# Altium PCB bootleg-3.PcbDoc (part 1 of 2)
Units mm, origin at the board's own origin, x right, y up, seen from the top; angles counter-clockwise.
Board outline 284.8 x 94.3 mm, 2 copper layers (Component Side, Bottom Layer), stack 1.571 mm thick; 153 components, 101 nets, 724 pads, 53 vias.
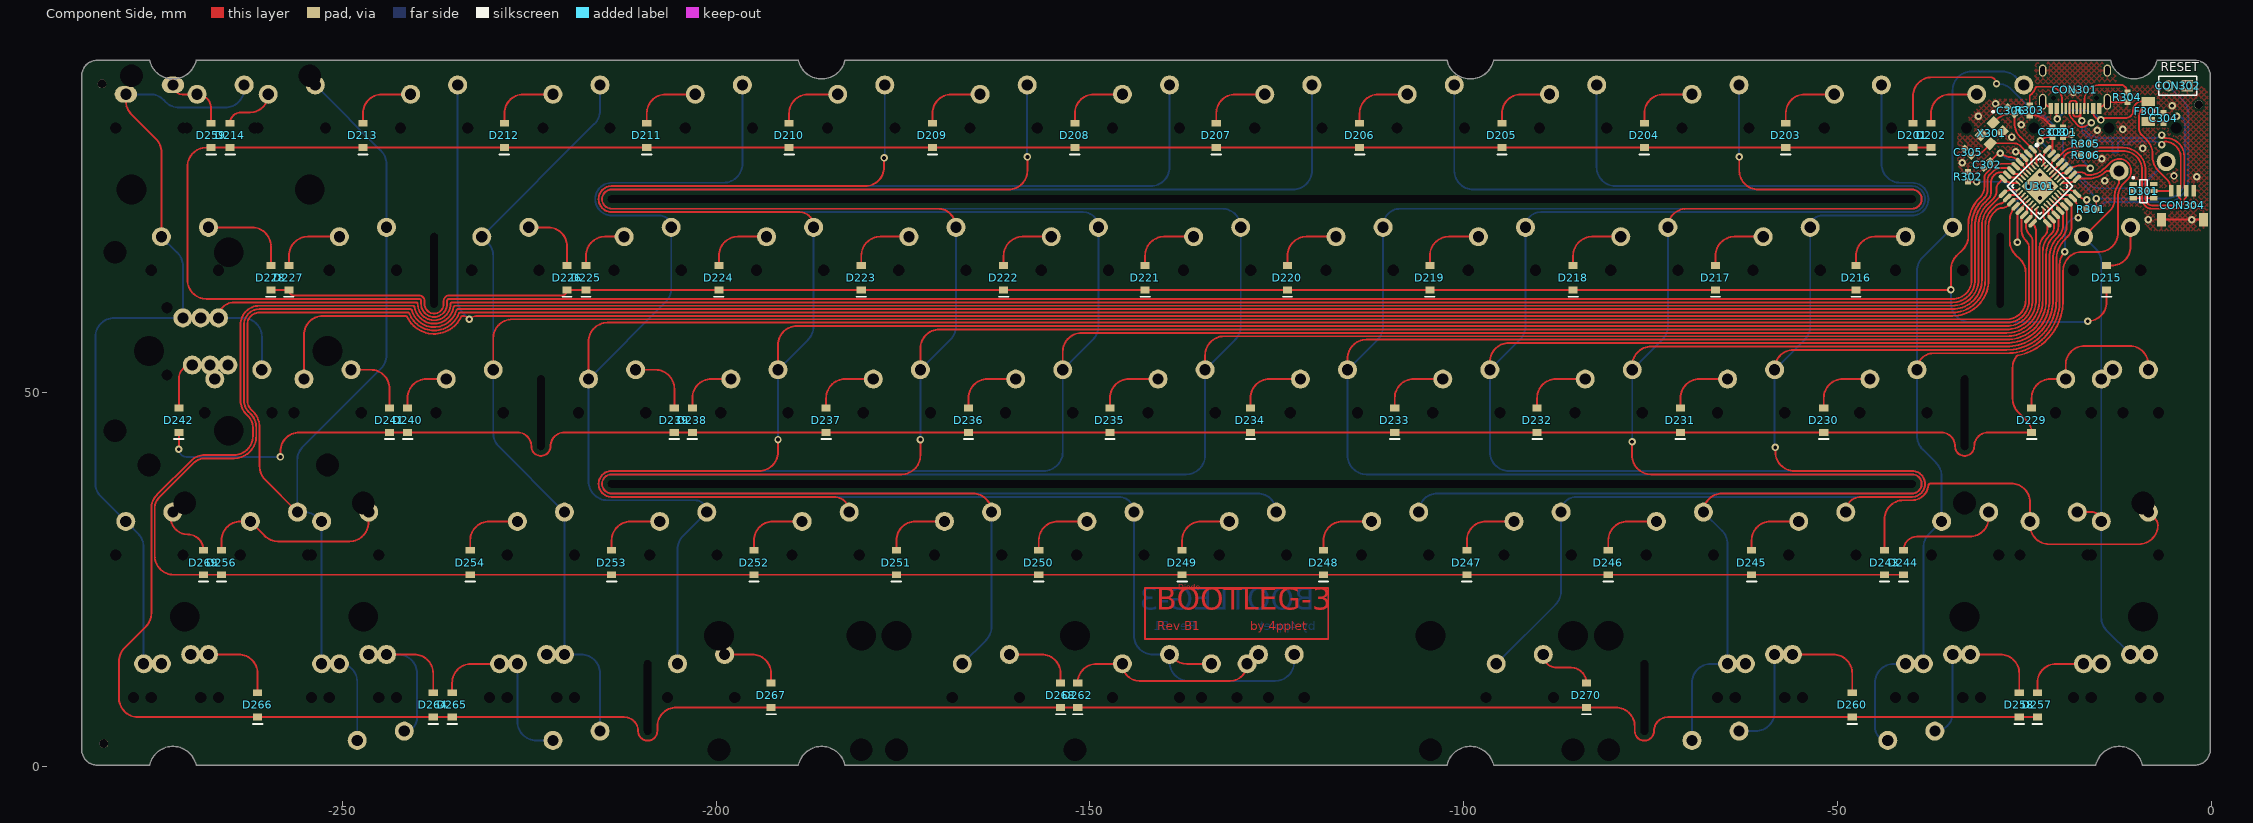
[diagram p0: Component Side view]
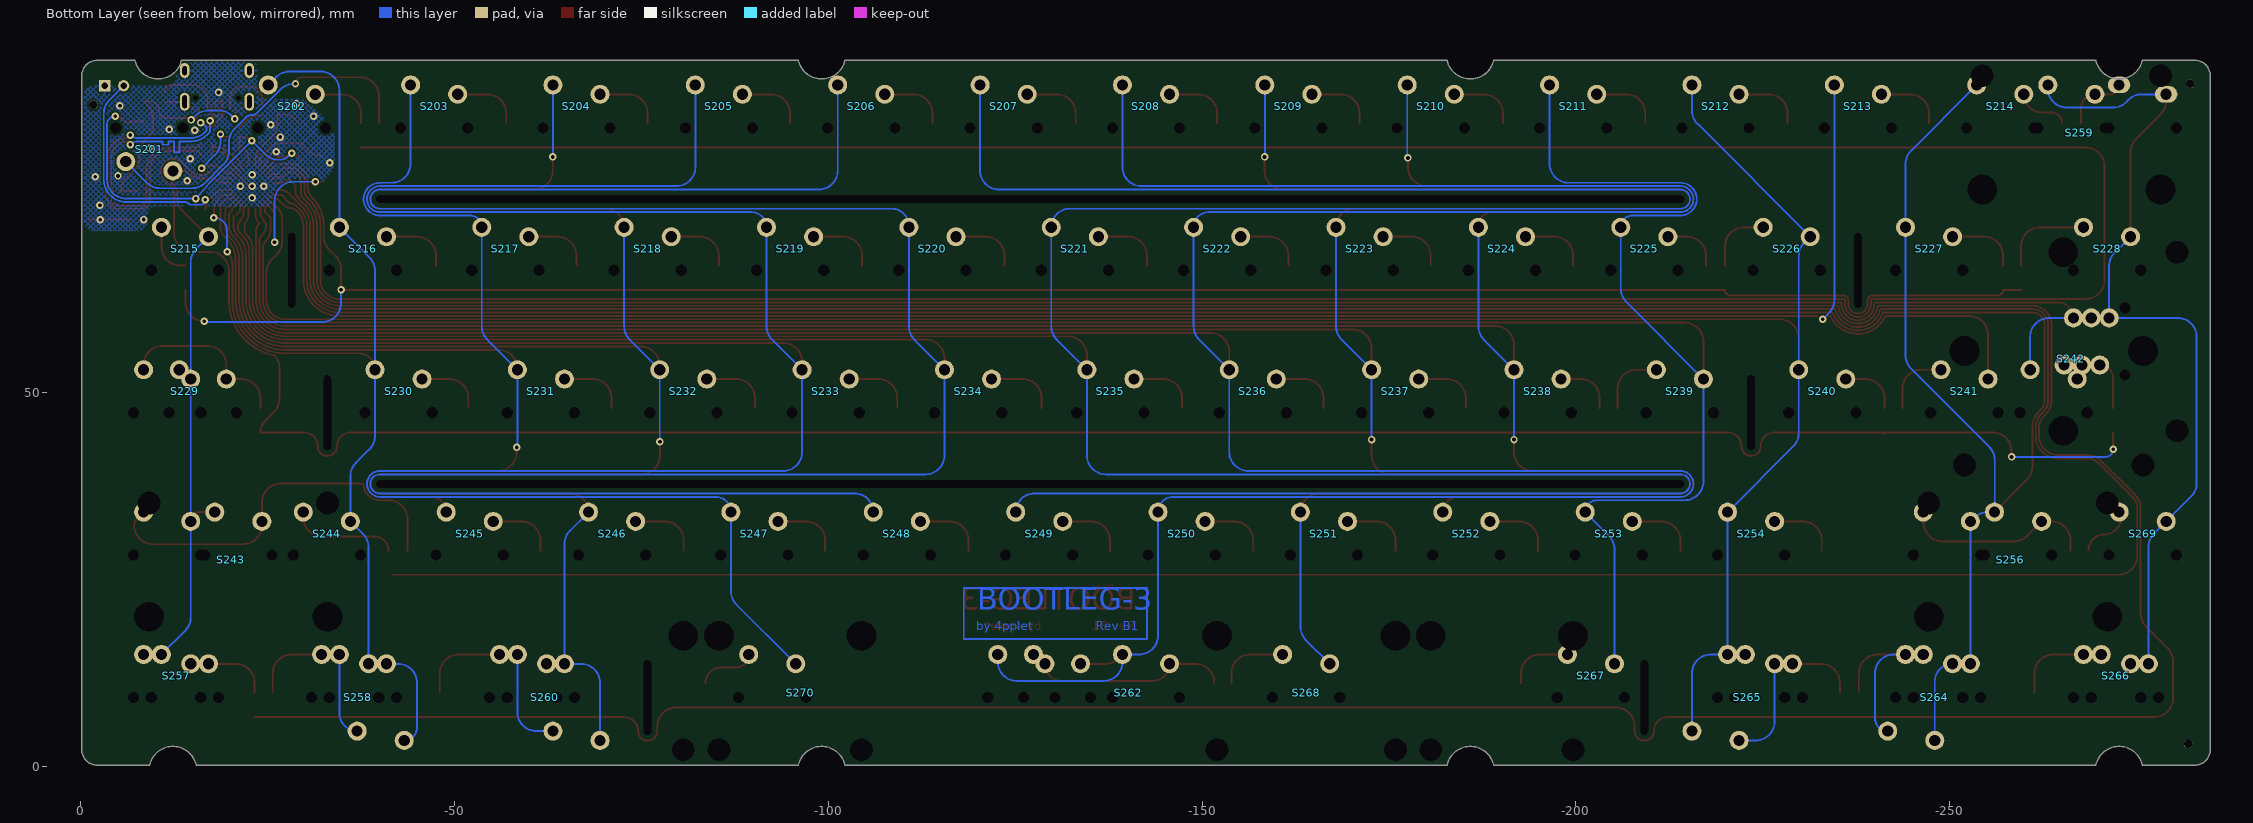
[diagram p1: Bottom Layer view, seen from below]

## Layer stack, top to bottom
Top Solder: solder mask 0.0102, Solder Resist, Dk 3.5
Component Side: signal copper 0.0356
Dielectric 1: core 1.5, FR-4, Dk 4.2
Bottom Layer: signal copper 0.0356
Solder Side: solder mask 0.0102, Solder Resist, Dk 3.5

## Board outline
-282.85,0.165 ccw(c-282.85,0.215) -282.85,0.165 cw(c-282.85,2.215) -284.9,2.215 -284.9,36.565 -284.9,92.414 cw(c-284.85,92.415) -284.9,92.415 cw(c-282.85,92.415) -282.85,94.465 cw(c-282.85,94.415) -282.85,94.465 -275.85,94.465 cw(c-275.85,94.415) -275.801,94.426 ccw(c-272.7,95.149) -269.599,94.426 cw(c-269.55,94.415) -269.55,94.465 -189.05,94.465 cw(c-189.05,94.415) -189.001,94.426 ccw(c-185.9,95.149) -182.799,94.426 cw(c-182.75,94.415) -182.75,94.465 -102.25,94.465 cw(c-102.25,94.415) -102.201,94.426 ccw(c-99.1,95.149) -95.999,94.426 cw(c-95.95,94.415) -95.95,94.465 cw(c-95.95,94.415) -95.95,94.465 -13.477,94.465 cw(c-13.477,94.415) -13.428,94.426 ccw(c-10.327,95.149) -7.226,94.426 cw(c-7.177,94.415) -7.164,94.464 cw(c-7.15,94.415) -7.15,94.465 -2.15,94.465 cw(c-2.15,92.415) -0.1,92.415 -0.1,2.288 -0.1,2.286 ccw(c-0.15,2.286) -0.1,2.288 -0.1,2.286 cw(c-0.15,2.286) -0.1,2.285 -0.1,2.215 cw(c-2.15,2.215) -2.15,0.165 -9.15,0.165 ccw(c-9.15,0.215) -9.15,0.165 cw(c-9.15,0.215) -9.199,0.204 ccw(c-12.3,-0.52) -15.401,0.204 cw(c-15.45,0.215) -15.45,0.165 -95.95,0.165 cw(c-95.95,0.215) -95.999,0.204 ccw(c-99.1,-0.52) -102.201,0.204 ccw(c-99.1,-0.52) -102.201,0.204 cw(c-102.25,0.215) -102.25,0.165 -182.75,0.165 cw(c-182.75,0.215) -182.799,0.204 cw(c-185.9,-0.52) -182.799,0.204 ccw(c-185.9,-0.52) -189.001,0.204 cw(c-189.05,0.215) -189.05,0.165 -269.55,0.165 cw(c-269.55,0.215) -269.55,0.165 cw(c-269.55,0.215) -269.599,0.204 ccw(c-272.7,-0.52) -275.801,0.204 ccw(c-272.7,-0.52) -275.801,0.204 cw(c-275.85,0.215) -275.85,0.165

## Design rules (kind name [scope] priority, off if disabled: settings)
Clearance [All] p1: gap=0.2 ignorepadtopadclearanceinfootprint=FALSE except(0: Arc-Hole Track-Hole SMDPad-Hole THPad-Hole Via-Hole Fill-Hole Poly-Hole Region-Hole Text-Hole; 0.254: THPad-THPad THPad-Via THPad-Fill THPad-Poly THPad-Region THPad-Text Via-Via Via-Fill Via-Poly Via-Region Via-Text Fill-Fill Fill-Poly Fill-Region Fill-Text Poly-Poly Poly-Region Poly-Text Region-Region Region-Text Text-Text)
ComponentClearance [InComponent('No Component') And OnLayer('Component Side')] p1: gap=0.254 collisioncheckmode=3 verticalgap=0.254 showdistances=FALSE
DiffPairsRouting DiffPairsRouting_USB [InDifferentialPairClass('All Differential Pairs')] p1: maxlimit=0.254 minlimit=0.203 mostfreqgap=0.203 toplayer_minwidth=0.152 toplayer_maxwidth=0.381 toplayer_prefwidth=0.152 bottomlayer_minwidth=0.152 bottomlayer_maxwidth=0.381 bottomlayer_prefwidth=0.152 maxuncoupledlength=12.7
DiffPairsRouting [All] p2: maxlimit=0.254 minlimit=0.254 mostfreqgap=0.254 toplayer_minwidth=0.381 toplayer_maxwidth=0.381 toplayer_prefwidth=0.381 bottomlayer_minwidth=0.381 bottomlayer_maxwidth=0.381 bottomlayer_prefwidth=0.381 maxuncoupledlength=12.7
HoleSize [All] p1: absolutevalues=TRUE maxlimit=20 minlimit=0.025 maxpercent=80.000 minpercent=20.000
MatchedLengths MatchedLengths_USB_DiffPairs_1 [All] p1: tolerance=0.127 checknetsindiffpair=TRUE checkdiffpairvsdiffpair=FALSE checkxsignals=FALSE checkothers=FALSE
MatchedLengths MatchedLengths_USB_DiffPairs [All] p2: tolerance=0.127 checknetsindiffpair=TRUE checkdiffpairvsdiffpair=FALSE checkxsignals=FALSE checkothers=FALSE
PolygonConnect PolygonConnect_1 [All vs IsVia] p1: connectstyle=Direct reliefconductorwidth=0.254 reliefentries=4 polygonreliefangle="90 Angle" airgapwidth=0.254
PolygonConnect [All] p2: connectstyle=Relief reliefconductorwidth=0.254 reliefentries=4 polygonreliefangle="90 Angle" airgapwidth=0.254
RoutingVias [All] p1: holewidth=0.711 width=1.27 viastyle="Through Hole" minholewidth=0.711 minwidth=1.27 maxholewidth=0.711 maxwidth=1.27
SolderMaskExpansion [All] p1: expansion=0.102 istentingtop=FALSE
Width [All] p1: maxlimit=0.254 minlimit=0.203 preferedwidth=0.254
27 further rules are at their usual default settings.

## Classes and differential pairs
component class Designator: C201 C202 C203 C204 C205 C206 D201 D202 D203 D204 D205 D206 D207 D208 D209 D210 D211 D212 D213 D214 D215 D216 D217 D218 D219 D220 D221 D222 D223 D224 D225 D226 D227 D228 D229 D230 D231 D232 D233 D234 D235 D236 D237 D238 D239 D240 D241 D242 D243 D244 D245 D246 D247 D248 D249 D250 D251 D252 D253 D254 D256 D257 D258 D259 D260 D262 D264 D265 D266 D267 D268 D269 D270 S201 S202 S203 S204 S205 S206 S207 S208 S209 S210 S211 S212 S213 S214 S215 S216 S217 S218 S219 S220 S221 S222 S223 S224 S225 S226 S227 S228 S229 S230 S231 S232 S233 S234 S235 S236 S237 S238 S239 S240 S241 S242 S243 S244 S245 S246 S247 S248 S249 S250 S251 S252 S253 S254 S256 S257 S258 S259 S260 S262 S264 S265 S266 S267 S268 S269 S270
differential pair D_PRE: +D_PRE_P -D_PRE_N
differential pair D: +D_P -D_N

## Components (designator, comment, footprint, x,y, rotation, side; value= is the part's Value field where it differs from the comment)
C301 "" C0603[1608] -19.812,84.836 r270 top value=1uF
C302 "" C0603[1608] -29.972,80.518 r45 top value=0.1uF
C303 "" C0603[1608] -21.209,84.836 r270 top value=0.1uF
C304 "" C0603[1608] -6.35,86.741 r270 top value=4,7uF
C305 "" C0603[1608] -32.512,82.169 r315 top value=15pF
C306 "" C0603[1608] -26.749,87.709 r315 top value=15pF
CON301 "TYPE-C-31-M-12" TYPE-C-31-M-12 -18.2,88 r180 top locked
CON302 "Header 2" HDR1X2 -3.175,91.059 r180 top
CON304 "Header 5" "JST SM04B-SRSS-TB" -6.616,73.152 r0 top
D201 "Diode" SOD-123 -39.878,84.415 r90 top locked
D202 "Diode" SOD-123 -37.465,84.415 r90 top locked
D203 "Diode" SOD-123 -56.896,84.415 r90 top locked
D204 "Diode" SOD-123 -75.819,84.415 r90 top locked
D205 "Diode" SOD-123 -94.869,84.415 r90 top locked
D206 "Diode" SOD-123 -113.919,84.415 r90 top locked
D207 "Diode" SOD-123 -133.096,84.415 r90 top locked
D208 "Diode" SOD-123 -152.019,84.415 r90 top locked
D209 "Diode" SOD-123 -171.069,84.415 r90 top locked
D210 "Diode" SOD-123 -190.246,84.415 r90 top locked
D211 "Diode" SOD-123 -209.296,84.415 r90 top locked
D212 "Diode" SOD-123 -228.346,84.415 r90 top locked
D213 "Diode" SOD-123 -247.269,84.415 r90 top locked
D214 "Diode" SOD-123 -265.049,84.415 r90 top locked
D215 "Diode" SOD-123 -13.97,65.365 r90 top locked
D216 "Diode" SOD-123 -47.498,65.365 r90 top locked
D217 "Diode" SOD-123 -66.294,65.365 r90 top locked
D218 "Diode" SOD-123 -85.344,65.365 r90 top locked
D219 "Diode" SOD-123 -104.521,65.365 r90 top locked
D220 "Diode" SOD-123 -123.571,65.365 r90 top locked
D221 "Diode" SOD-123 -142.621,65.365 r90 top locked
D222 "Diode" SOD-123 -161.544,65.365 r90 top locked
D223 "Diode" SOD-123 -180.594,65.365 r90 top locked
D224 "Diode" SOD-123 -199.644,65.365 r90 top locked
D225 "Diode" SOD-123 -217.424,65.365 r90 top locked
D226 "Diode" SOD-123 -219.964,65.365 r90 top locked
D227 "Diode" SOD-123 -257.175,65.365 r90 top locked
D228 "Diode" SOD-123 -259.588,65.365 r90 top locked
D229 "Diode" SOD-123 -24.003,46.315 r90 top locked
D230 "Diode" SOD-123 -51.816,46.315 r90 top locked
D231 "Diode" SOD-123 -70.993,46.315 r90 top locked
D232 "Diode" SOD-123 -90.17,46.315 r90 top locked
D233 "Diode" SOD-123 -109.22,46.315 r90 top locked
D234 "Diode" SOD-123 -128.524,46.315 r90 top locked
D235 "Diode" SOD-123 -147.32,46.315 r90 top locked
D236 "Diode" SOD-123 -166.243,46.315 r90 top locked
D237 "Diode" SOD-123 -185.293,46.315 r90 top locked
D238 "Diode" SOD-123 -203.2,46.315 r90 top locked
D239 "Diode" SOD-123 -205.613,46.315 r90 top locked
D240 "Diode" SOD-123 -241.3,46.315 r90 top locked
D241 "Diode" SOD-123 -243.713,46.315 r90 top
D242 "Diode" SOD-123 -271.907,46.315 r90 top
D243 "Diode" SOD-123 -43.688,27.265 r90 top locked
D244 "Diode" SOD-123 -41.148,27.265 r90 top locked
D245 "Diode" SOD-123 -61.468,27.265 r90 top locked
D246 "Diode" SOD-123 -80.645,27.265 r90 top locked
D247 "Diode" SOD-123 -99.568,27.265 r90 top locked
D248 "Diode" SOD-123 -118.745,27.265 r90 top locked
D249 "Diode" SOD-123 -137.668,27.265 r90 top locked
D250 "Diode" SOD-123 -156.845,27.265 r90 top locked
D251 "Diode" SOD-123 -175.895,27.265 r90 top locked
D252 "Diode" SOD-123 -194.945,27.265 r90 top locked
D253 "Diode" SOD-123 -213.995,27.265 r90 top locked
D254 "Diode" SOD-123 -232.918,27.265 r90 top locked
D256 "Diode" SOD-123 -266.192,27.265 r90 top locked
D257 "Diode" SOD-123 -23.241,8.215 r90 top locked
D258 "Diode" SOD-123 -25.654,8.215 r90 top locked
D259 "Diode" SOD-123 -267.589,84.415 r90 top locked
D260 "Diode" SOD-123 -48.006,8.215 r90 top locked
D262 "Diode" SOD-123 -151.638,9.5 r90 top locked
D264 "Diode" SOD-123 -237.871,8.215 r90 top locked
D265 "Diode" SOD-123 -235.331,8.215 r90 top locked
D266 "Diode" SOD-123 -261.366,8.215 r90 top locked
D267 "Diode" SOD-123 -192.659,9.51 r90 top locked
D268 "Diode" SOD-123 -153.924,9.5 r90 top locked
D269 "Diode" SOD-123 -268.605,27.265 r90 top locked
D270 "Diode" SOD-123 -83.566,9.5 r90 top locked
D301 "SRV05" SOT-23-6 -9.017,76.962 r0 top
F301 "Fuse Thermal" C1206[3216] -8.382,87.63 r90 top
R301 "Res1" R0603[1608] -16.002,74.549 r180 top value=10K
R302 "Res1" R0603[1608] -32.512,78.867 r90 top value=10K
R303 "Res1" R0603[1608] -24.257,87.757 r270 top value=5k1
R304 "Res1" R0603[1608] -11.176,89.535 r270 top value=5k1
R305 "Res1" R0603[1608] -16.764,83.312 r0 top value=22
R306 "Res1" R0603[1608] -16.764,81.788 r0 top value=22
S201 "MX" "SMK-switch - switched polarity" -9.15,85.415 r0 bottom
S202 "MX" "SMK-switch - switched polarity" -28.2,85.415 r180 bottom locked
S203 "MX" "SMK-switch - switched polarity" -47.25,85.415 r180 bottom locked
S204 "MX" "SMK-switch - switched polarity" -66.3,85.415 r180 bottom locked
S205 "MX" "SMK-switch - switched polarity" -85.35,85.415 r180 bottom locked
S206 "MX" "SMK-switch - switched polarity" -104.4,85.415 r180 bottom locked
S207 "MX" "SMK-switch - switched polarity" -123.45,85.415 r180 bottom locked
S208 "MX" "SMK-switch - switched polarity" -142.5,85.415 r180 bottom locked
S209 "MX" "SMK-switch - switched polarity" -161.55,85.415 r180 bottom locked
S210 "MX" "SMK-switch - switched polarity" -180.6,85.415 r180 bottom locked
S211 "MX" "SMK-switch - switched polarity" -199.65,85.415 r180 bottom locked
S212 "MX" "SMK-switch - switched polarity" -218.7,85.415 r180 bottom locked
S213 "MX" "SMK-switch - switched polarity" -237.75,85.415 r180 bottom locked
S214 "MX" "SMK-switch - switched polarity" -256.8,85.415 r180 bottom locked
S215 "MX" "SMK-switch - 1.5U" -13.912,66.365 r180 bottom locked
S216 "MX" "SMK-switch - switched polarity" -37.725,66.365 r180 bottom
S217 "MX" "SMK-switch - switched polarity" -56.775,66.365 r180 bottom locked
S218 "MX" "SMK-switch - switched polarity" -75.825,66.365 r180 bottom locked
S219 "MX" "SMK-switch - switched polarity" -94.875,66.365 r180 bottom locked
S220 "MX" "SMK-switch - switched polarity" -113.925,66.365 r180 bottom locked
S221 "MX" "SMK-switch - switched polarity" -132.975,66.365 r180 bottom locked
S222 "MX" "SMK-switch - switched polarity" -152.025,66.365 r180 bottom locked
S223 "MX" "SMK-switch - switched polarity" -171.075,66.365 r180 bottom locked
S224 "MX" "SMK-switch - switched polarity" -190.125,66.365 r180 bottom locked
S225 "MX" "SMK-switch - switched polarity" -209.175,66.365 r180 bottom locked
S226 "MX" SMK-switch -228.225,66.365 r180 bottom locked
S227 "MX" "SMK-switch - switched polarity" -247.275,66.365 r180 bottom locked
S228 "MX" "SMK-switch - 1.5U" -271.087,66.365 r180 bottom locked
S229 "MX" "SMK-switch - CAPS - dual" -16.294,47.315 r180 bottom
S230 "MX" "SMK-switch - switched polarity" -42.487,47.315 r180 bottom locked
S231 "MX" "SMK-switch - switched polarity" -61.537,47.315 r180 bottom locked
S232 "MX" "SMK-switch - switched polarity" -80.587,47.315 r180 bottom locked
S233 "MX" "SMK-switch - switched polarity" -99.637,47.315 r180 bottom locked
S234 "MX" "SMK-switch - switched polarity" -118.687,47.315 r180 bottom locked
S235 "MX" "SMK-switch - switched polarity" -137.737,47.315 r180 bottom locked
S236 "MX" "SMK-switch - switched polarity" -156.787,47.315 r180 bottom locked
S237 "MX" "SMK-switch - switched polarity" -175.837,47.315 r180 bottom locked
S238 "MX" "SMK-switch - switched polarity" -194.887,47.315 r180 bottom locked
S239 "MX" SMK-switch -213.937,47.315 r180 bottom locked
S240 "MX" "SMK-switch - switched polarity" -232.987,47.315 r180 bottom locked
S241 "MX" SMK-switch -252.012,47.315 r180 bottom locked
S242 "MX" "SMK-switch - Enter" -263.95,47.315 r180 bottom locked
S243 "MX" "SMK-switch - Left shift v2" -21.056,28.265 r180 bottom locked
S244 "MX" SMK-switch -32.893,28.265 r180 bottom locked
S245 "MX" "SMK-switch - switched polarity" -52.012,28.265 r180 bottom locked
S246 "MX" "SMK-switch - switched polarity" -71.062,28.265 r180 bottom locked
S247 "MX" "SMK-switch - switched polarity" -90.112,28.265 r180 bottom locked
S248 "MX" "SMK-switch - switched polarity" -109.162,28.265 r180 bottom locked
S249 "MX" "SMK-switch - switched polarity" -128.212,28.265 r180 bottom locked
S250 "MX" "SMK-switch - switched polarity" -147.262,28.265 r180 bottom locked
S251 "MX" "SMK-switch - switched polarity" -166.312,28.265 r180 bottom locked
S252 "MX" "SMK-switch - switched polarity" -185.362,28.265 r180 bottom locked
S253 "MX" "SMK-switch - switched polarity" -204.412,28.265 r180 bottom locked
S254 "MX" "SMK-switch - switched polarity" -223.462,28.265 r180 bottom locked
S256 "MX" "SMK-switch - right shift v2" -259.18,28.265 r180 bottom
S257 "MX" "SMK-switch - 1.5u MOD-L" -13.912,9.215 r180 bottom locked
S258 "MX" "SMK-switch - L_WIN V2" -37.719,9.215 r180 bottom
S259 "MX" "SMK-switch - backspace" -266.319,85.415 r180 bottom
S260 "MX" "SMK-switch - L_ALT V2" -61.537,9.215 r180 bottom locked
S262 "MX" "SMK-SWITCH - SPACE_V3" -142.499,9.215 r180 bottom locked
S264 "MX" "SMK-switch - R_WIN V2" -247.269,9.215 r180 bottom
S265 "MX" "SMK-switch - R_ALT V2" -223.462,9.215 r180 bottom
S266 "MX" "SMK-switch - 1.5u MOD-R" -271.087,9.215 r180 bottom locked
S267 "MX" SMK-switch -202.031,9.215 r180 bottom
S268 "MX" "SMK-switch - R split space_V2" -163.931,9.215 r0 bottom locked
S269 "MX" SMK-switch -275.85,28.265 r180 bottom locked
S270 "MX" "SMK-switch - L split space_V2" -102.018,9.215 r0 bottom locked
U301 "ATMEGA32U2" ATMEGA32U2-COMBO -22.886,77.6 r315 top
X301 "XTAL" XTAL-3225 -29.337,84.709 r225 top

## Footprints (in the part's own frame and the unit in brackets; to place one, negate y for a bottom-side part, rotate by r counter-clockwise, add the part's x,y. Pads: shape width x height; smd on the part's side, far side on the other; paste and mask are expansions set on the pad)
ATMEGA32U2-COMBO [mm]
  oval 1.4x0.55 smd: 1(-4.2,2.8) 2(-4.2,2) 3(-4.2,1.2) 4(-4.2,0.4) 5(-4.2,-0.4) 6(-4.2,-1.2) 7(-4.2,-2) 8(-4.2,-2.8) 17(4.2,-2.8) 18(4.2,-2) 19(4.2,-1.2) 20(4.2,-0.4) 21(4.2,0.4) 22(4.2,1.2) 23(4.2,2) 24(4.2,2.8)
  oval 0.85x0.25 smd: 1(-2.4,1.75) 2(-2.4,1.25) 3(-2.4,0.75) 4(-2.4,0.25) 5(-2.4,-0.25) 6(-2.4,-0.75) 7(-2.4,-1.25) 8(-2.4,-1.75) 17(2.4,-1.75) 18(2.4,-1.25) 19(2.4,-0.75) 20(2.4,-0.25) 21(2.4,0.25) 22(2.4,0.75) 23(2.4,1.25) 24(2.4,1.75)
  oval 0.55x1.4 smd: 9(-2.8,-4.2) 10(-2,-4.2) 11(-1.2,-4.2) 12(-0.4,-4.2) 13(0.4,-4.2) 14(1.2,-4.2) 15(2,-4.2) 16(2.8,-4.2) 25(2.8,4.2) 26(2,4.2) 27(1.2,4.2) 28(0.4,4.2) 29(-0.4,4.2) 30(-1.2,4.2) 31(-2,4.2) 32(-2.8,4.2)
  oval 0.25x0.85 smd: 9(-1.75,-2.4) 10(-1.25,-2.4) 11(-0.75,-2.4) 12(-0.25,-2.4) 13(0.25,-2.4) 14(0.75,-2.4) 15(1.25,-2.4) 16(1.75,-2.4) 25(1.75,2.4) 26(1.25,2.4) 27(0.75,2.4) 28(0.25,2.4) 29(-0.25,2.4) 30(-0.75,2.4) 31(-1.25,2.4) 32(-1.75,2.4)
  rect 3.5x3.5 smd: 28(0,0)
  silkscreen extent -4.32,-3.1 3.1,3.75, body extent -2.51,-2.51 2.51,2.51, height 1
C0603[1608] [mm] "Chip Resistor, 2-Leads, Body 1,57x0,80mm, IPC Medium Density"
  rect 0.8x0.85 smd: 1(-0.65,0) 2(0.65,0)
  body extent -0.83,-0.43 0.82,0.43, height 0.5
C1206[3216] [mm]
  rect 1.2x1.8 smd: 1(-1.35,0) 2(1.35,0)
  silkscreen extent -0.35,-0.8 0.35,0.8, body extent -1.6,-0.9 1.6,0.9, height 1.2
HDR1X2 [mm] "Connector; Header; 2 Position"
  rect 1.5x1.5 hole 0.9 mask+0.102: 1(0,0)
  round 1.5 hole 0.9 mask+0.102: 2(2.54,0)
  silkscreen extent -1.27,-1.27 3.81,1.27
"JST SM04B-SRSS-TB" [mm]
  rect 0.6x1.55 smd: 1(1.3,3.875) 2(2.3,3.875) 3(3.3,3.875) 4(4.3,3.875)
  rect 1.2x1.8 smd: 5(0,0) 5(5.6,0)
  body extent -0.21,-0.76 5.79,4.19, height 3.25
R0603[1608] [mm] "Chip Resistor, 2-Leads, Body 1,57x0,80mm, IPC Medium Density"
  rect 0.8x0.85 smd: 1(-0.65,0) 2(0.65,0)
  body extent -0.83,-0.43 0.82,0.43, height 0.5
SMK-switch [mm]
  round 2.54 hole 1.499 mask+0.102: 1(-3.15,5.75) 2(3.15,4.5)
  round 1 hole 1.5 unplated: ""(-4.5,0) ""(4.5,0)
  round 1 on Mech14: ""(0,0)
"SMK-switch - 1.5U" [mm]
  round 2.54 hole 1.499 mask+0.102: 1(-3.15,5.75) 2(3.15,4.5)
  round 1 hole 1.5 unplated: ""(-4.5,0) ""(4.5,0)
  round 1 on Mech14: ""(0,0)
"SMK-switch - 1.5u MOD-L" [mm]
  round 2.54 hole 1.499 mask+0.102: 1(-5.531,5.75) 1(-3.15,5.75) 2(0.769,4.5) 2(3.15,4.5)
  round 1 hole 1.5 unplated: ""(-6.881,0) ""(-4.5,0) ""(2.119,0) ""(4.5,0)
  round 1 on Mech14: ""(-2.381,0) ""(0,0)
"SMK-switch - 1.5u MOD-R" [mm]
  round 2.54 hole 1.499 mask+0.102: 1(-3.15,5.75) 1(-0.769,5.75) 2(3.15,4.5) 2(5.531,4.5)
  round 1 hole 1.5 unplated: ""(-4.5,0) ""(-2.119,0) ""(4.5,0) ""(6.881,0)
  round 1 on Mech14: ""(0,0) ""(2.381,0)
"SMK-switch - backspace" [mm]
  round 2.54 hole 1.499 mask+0.102: 1(3.15,4.5) 2(-3.15,5.75)
  oval 3x2.2 hole 1.499 mask+0.102: 1(6.375,5.75) 2(12.675,4.5)
  round 1.524 hole 3.988 unplated: ""(-11.938,-8.255) ""(11.938,-8.255)
  round 1.524 hole 3.048 unplated: ""(-11.938,6.985) ""(11.938,6.985)
  round 1 hole 1.5 unplated: ""(-4.5,0) ""(4.5,0) ""(5.025,0) ""(14.025,0)
  round 1 on Mech14: ""(0,0) ""(9.525,0)
"SMK-switch - CAPS - dual" [mm]
  round 2.54 hole 1.499 mask+0.102: 1(-7.912,5.75) 1(3.15,4.5) 2(-3.15,5.75) 2(-1.613,4.5)
  round 1 hole 1.5 unplated: ""(-9.263,0) ""(-4.5,0) ""(-0.262,0) ""(4.5,0)
  round 1 on Mech14: ""(-4.763,0) ""(0,0)
"SMK-switch - Enter" [mm]
  round 2.54 hole 1.499 mask+0.102: 1(-3.15,5.75) 1(2.649,12.68) 1(5.03,12.68) 1(7.411,12.68) 2(1.399,6.38) 2(3.15,4.5) 2(3.78,6.38) 2(6.161,6.38)
  round 1.524 hole 3.048 unplated: ""(-11.938,-6.985) ""(11.938,-6.985) ""(16.515,-2.408) ""(16.515,21.468)
  round 1.524 hole 3.988 unplated: ""(-11.938,8.255) ""(1.275,-2.408) ""(1.275,21.468) ""(11.938,8.255)
  round 1 hole 1.5 unplated: ""(-4.5,0) ""(4.5,0) ""(9.53,5.03) ""(9.53,14.03)
  round 1 on Mech14: ""(0,0) ""(7.149,9.53) ""(9.53,9.53) ""(11.911,9.53)
"SMK-switch - L split space_V2" [mm]
  round 2.54 hole 1.499 mask+0.102: 1(12.675,-5.75) 2(6.375,-4.5)
  round 1.524 hole 3.988 unplated: ""(-2.413,-8.255)
  round 1.524 hole 3.048 unplated: ""(-2.413,6.985)
  round 1 hole 1.5 unplated: ""(5.025,0) ""(14.025,0)
  round 1 on Mech14: ""(9.525,0)
"SMK-switch - L_ALT V2" [mm]
  round 2.54 hole 1.499 mask+0.102: 1(-5.531,5.75) 1(-3.15,5.75) 1(1.613,-4.5) 2(0.769,4.5) 2(3.15,4.5) 2(7.912,-5.75)
  round 1 hole 1.5 unplated: ""(-6.881,0) ""(-4.5,0) ""(2.119,0) ""(4.5,0)
  round 1 on Mech14: ""(-2.381,0) ""(0,0) ""(4.763,0)
"SMK-switch - L_WIN V2" [mm]
  round 2.54 hole 1.499 mask+0.102: 1(-5.531,5.75) 1(-3.15,5.75) 1(-0.769,-4.5) 2(0.769,4.5) 2(3.15,4.5) 2(5.531,-5.75)
  round 1 hole 1.5 unplated: ""(-6.881,0) ""(-4.5,0) ""(2.119,0) ""(4.5,0)
  round 1 on Mech14: ""(-2.381,0) ""(0,0) ""(2.381,0)
"SMK-switch - Left shift v2" [mm]
  round 2.54 hole 1.499 mask+0.102: 1(-12.675,5.75) 1(3.15,4.5) 2(-6.375,4.5) 2(-3.15,5.75)
  round 1 hole 1.5 unplated: ""(-14.025,0) ""(-5.025,0) ""(-4.5,0) ""(4.5,0)
  round 1.524 hole 3.988 unplated: ""(-11.938,-8.255) ""(11.938,-8.255)
  round 1.524 hole 3.048 unplated: ""(-11.938,6.985) ""(11.938,6.985)
  round 1 on Mech14: ""(-9.525,0) ""(0,0)
"SMK-switch - R split space_V2" [mil]
  round 100 hole 59 mask+4: 1(124.02,-226.38) 2(-124.02,-177.17)
  round 60 hole 157.01 unplated: ""(-470,-325) ""(470,-325)
  round 60 hole 120 unplated: ""(-470,275) ""(470,275)
  round 39.37 hole 59.06 unplated: ""(-177.17,0) ""(177.17,0)
  round 39.37 on Mech14: ""(0,0)
"SMK-switch - R_ALT V2" [mm]
  round 2.54 hole 1.499 mask+0.102: 1(-7.912,-4.5) 1(-3.15,5.75) 1(-0.769,5.75) 2(-1.613,-5.75) 2(3.15,4.5) 2(5.531,4.5)
  round 1 on Mech14: ""(-4.763,0) ""(0,0) ""(2.381,0)
  round 1 hole 1.5 unplated: ""(-4.5,0) ""(-2.119,0) ""(4.5,0) ""(6.881,0)
"SMK-switch - R_WIN V2" [mm]
  round 2.54 hole 1.499 mask+0.102: 1(-5.531,-4.5) 1(-3.15,5.75) 1(-0.769,5.75) 2(0.769,-5.75) 2(3.15,4.5) 2(5.531,4.5)
  round 1 hole 1.5 unplated: ""(-4.5,0) ""(-2.119,0) ""(4.5,0) ""(6.881,0)
  round 1 on Mech14: ""(-2.381,0) ""(0,0) ""(2.381,0)
"SMK-switch - right shift v2" [mm]
  round 2.54 hole 1.499 mask+0.102: 1(-12.675,5.75) 1(3.15,4.5) 2(-6.375,4.5) 2(-3.15,5.75)
  round 1 hole 1.5 unplated: ""(-14.025,0) ""(-5.025,0) ""(-4.5,0) ""(4.5,0)
  round 1.524 hole 3.988 unplated: ""(-11.938,-8.255) ""(11.938,-8.255)
  round 1.524 hole 3.048 unplated: ""(-11.938,6.985) ""(11.938,6.985)
  round 1 on Mech14: ""(-9.525,0) ""(0,0)
"SMK-SWITCH - SPACE_V3" [mm]
  round 2.54 hole 1.499 mask+0.102: 1(-19.826,5.75) 1(-8.756,4.5) 1(-3.15,5.75) 2(-15.056,5.75) 2(-13.526,4.5) 2(3.15,4.5)
  round 1.524 hole 3.048 unplated: ""(-61.91,-6.985) ""(-57.15,-6.985) ""(38.09,-6.985) ""(57.15,-6.985)
  round 1.524 hole 3.988 unplated: ""(-61.91,8.255) ""(-57.15,8.255) ""(38.09,8.255) ""(57.15,8.255)
  round 1 hole 1.5 unplated: ""(-21.176,0) ""(-16.406,0) ""(-12.176,0) ""(-7.406,0) ""(-4.5,0) ""(4.5,0)
  round 1 on Mech14: ""(-16.676,0) ""(-11.906,0) ""(0,0)
"SMK-switch - switched polarity" [mm]
  round 2.54 hole 1.499 mask+0.102: 1(3.15,4.5) 2(-3.15,5.75)
  round 1 hole 1.5 unplated: ""(-4.5,0) ""(4.5,0)
  round 1 on Mech14: ""(0,0)
SOD-123 [mm]
  rect 0.91x1.22 smd: 1(1.635,0) 2(-1.635,0)
  silkscreen extent -2.54,-0.64 -2.54,0.63, body extent -1.87,-0.85 1.88,0.85, height 1.2
SOT-23-6 [mm]
  rect 1x0.55 smd: 1(-1.375,0.95) 2(-1.375,0) 3(-1.375,-0.95) 4(1.375,-0.95) 5(1.375,0) 6(1.375,0.95)
  silkscreen extent -1.5,-1.55 0.46,1.92, body extent -1.37,-1.44 1.47,1.49, height 1.05
TYPE-C-31-M-12 [mm]
  rect 0.6x1.45 smd: A1B12(-3.25,0) A4B9(-2.45,0) B1A12(3.25,0) B4A9(2.45,0)
  rect 0.3x1.45 smd: A5(-1.25,0) A6(-0.25,0) A7(0.25,0) A8(1.25,0) B5(1.75,0) B6(0.75,0) B7(-0.75,0) B8(-1.75,0)
  oval 1x2.1 / inner oval 1x2.1 / far side oval 1.3x2.4 hole 0.6 slot 1.7 at 90 deg: S1(-4.32,-0.915) S1(4.32,-0.915)
  oval 1x1.6 / inner oval 1x1.6 / far side oval 1.3x2 hole 0.6 slot 1.2 at 90 deg: S1(-4.32,-5.095) S1(4.32,-5.095)
  round 0 hole 0.65 unplated: ""(-2.89,-1.445) ""(2.89,-1.445)
  body extent -4.47,-7.72 4.47,0.18, height 3.21
XTAL-3225 [mm]
  rect 1.4x1.2 smd: 1(-1.1,-0.85) 2(1.1,-0.85) 3(1.1,0.85) 4(-1.1,0.85)
  silkscreen extent -2.28,-2.03 -2.03,-1.78, body extent -1.6,-1.25 1.6,1.25, height 0.65

## Part data
C301: library part Cap, "Capacitor", LCSC MFG="Samsung Electro-Mechanics", LCSC Part #=C15849, MFG=KEMET, MFGPN=C0603C104M5RACTU, MRF.Part=CL10A105KB8NNNC, Version="0603 imperial"
C302 C303: library part Cap, "Capacitor", LCSC MFG=YAGEO, LCSC Part #=C14663, MFG=KEMET, MFGPN=C0603C104M5RACTU, MRF.Part=CC0603KRX7R9BB104, Version="0603 imperial"
C304: library part Cap, "Capacitor", LCSC MFG="Samsung Electro-Mechanics", LCSC Part #=C19666, MRF.Part=CL10A475KO8NNNC
C305 C306: library part Cap, "Capacitor", LCSC MFG="Samsung Electro-Mechanics", LCSC Part #=C1644, MRF.Part=CL10C150JB8NNNC, Version="0603 imperial"
CON301: LCSC MFG="Korean Hroparts Elec", LCSC Part #=C165948, MFG="Korean Hroparts Elec", MFGPN=TYPE-C-31-M-12, MRF.Part=TYPE-C-31-M-12
CON302: "Header, 2-Pin"
CON304: "JST for USB daughter board", LCSC MFG="JST Sales America", LCSC Part #=C160404, MFG="JST Sales America Inc.", MFGPN=SM04B-SRSS-TB(LF)(SN), MRF.Part=SM04B-SRSS-TB(LF)(SN)
D201 D202 D203 D204 D205 D206 D207 D208 D209 D210 D211 D212 D213 D214 D215 D216 D217 D218 D219 D220 D221 D222 D223 D224 D225 D226 D227 D228 D229 D230 D231 D232 D233 D234 D235 D236 D237 D238 D239 D240 D241 D242 D243 D244 D245 D246 D247 D248 D249 D250 D251 D252 D253 D254 D256 D257 D258 D259 D260 D262 D264 D265 D266 D267 D268 D269 D270: "Default Diode", LCSC MFG="Brightking Elec (TAIWAN)", LCSC Part #=C109002, MFG="Bourns Inc.", MFGPN=CD0603-B0340R, MRF.Part=CD4148WTP, Version="0603 imperial"
D301: LCSC MFG="ProTek Devices", LCSC Part #=C85364, MRF.Part=SRV05-4-P-T7
F301: "Thermal Fuse", LCSC MFG="Shenzhen JDT Fuse", LCSC Part #=C135338, MFG="Bel Fuse Inc.", MFGPN=0ZCJ0050FF2G, MRF.Part=ASMD1206-050
R301 R302: "Resistor", LCSC MFG="Uniroyal Elec", LCSC Part #=C25804, MFG="Panasonic Electronic Components", MFGPN=ERJ-3EKF5101V, MRF.Part=0603WAF1002T5E, Version="0603 imperial"
R303 R304: "Resistor", LCSC MFG="Uniroyal Elec", LCSC Part #=C23186, MFG="Panasonic Electronic Components", MFGPN=ERJ-3EKF5101V, MRF.Part=0603WAF5101T5E, Version="0603 imperial"
R305 R306: "Resistor", LCSC MFG="Uniroyal Elec", LCSC Part #=C23345, MFG="Panasonic Electronic Components", MFGPN=ERJ-3EKF5101V, MRF.Part=0603WAF220JT5E, Version="0603 imperial"
S201 S202 S203 S204 S205 S206 S207 S208 S209 S210 S211 S212 S213 S214 S216 S217 S218 S219 S220 S221 S222 S223 S224 S225 S226 S227 S228 S229 S230 S231 S232 S233 S234 S235 S236 S237 S238 S239 S240 S241 S242 S243 S244 S245 S246 S247 S248 S249 S250 S251 S252 S253 S254 S256 S257 S258 S259 S260 S262 S264 S265 S266 S267 S268 S269 S270: library part SW-PB, "Switch"
S215: library part SW-PB, "TAB"
U301: LCSC MFG="Microchip Tech", LCSC Part #=C57345, MFG="Microchip Technology", MFGPN=ATMEGA32U2-AUR, MRF.Part=ATMEGA32U2-MU
X301: "Crystal Oscillator", LCSC MFG="Yangxing Tech", LCSC Part #=C13738, MRF.Part=X322516MLB4SI

## Free pads (board coordinates)
  round 1.152 hole 1.152 unplated paste+0.148 mask+0.148: ""(-282.194,91.313) ""(-281.94,3.048) ""(-1.651,88.519)
  round 0 hole 1 slot 10 at 90 deg unplated: ""(-237.75,66.365) ""(-223.462,47.315) ""(-209.169,9.215) ""(-75.819,9.215) ""(-32.962,47.315) ""(-28.2,66.365)
  round 0 hole 1 slot 175 at 0 deg unplated: ""(-127,37.79) ""(-127,75.89)

## Via types
v1: diameter 1, hole 0.5, Component Side to Bottom Layer, tented both sides, 48 vias
v2: diameter 1, hole 0.5, Component Side to Bottom Layer, tented bottom, 5 vias

## Nets (pads, with @x,y where several pads share a name; then routed paths per layer and width w, separated by ;. In a path a pad name is that pad's centre, name@x,y a point inside that pad or via, vN(x,y) a via of type N, cw(c..) or ccw(c..) an arc to the next point about the centre after c; other vN are vias at no path point)
col1: S201.2 S215.2 S229.2 S243.2 S257.1 U301.25 | length 84.1
  Component Side w0.254: U301.25@-19.952,78.06 -19.217,78.06 ccw(c-19.217,79.871) U301.25@-17.936,78.59 cw(c-17.728,78.382) -17.728,78.677 cw(c-17.728,78.423) -17.725,78.677 -16.439,78.667 ccw(c-16.431,79.726) -16.431,78.667 -16.236,78.667 ccw(c-16.236,81.63) -15.997,78.677 ccw(c-16.236,81.63) -15.266,78.83 ccw(c-16.236,81.63) -14.195,79.482 cw(c-14.02,79.298) -14.159,79.51 ccw(c-15.744,81.938) -14.009,79.615 cw(c-13.858,79.411) -13.856,79.665 S201.2@-12.3,79.665 -12.3,78.09 cw(c-12.554,78.089) -12.347,77.942 ccw(c-9.906,76.208) -12.689,77.312 ccw(c-9.906,76.208) -12.874,76.604 ccw(c-9.906,76.208) -12.9,76.208 -12.9,75.819 cw(c-14.916,75.819) -13.49,74.394 -16.439,71.445 S215.2@-16.452,71.445 ; S243.2@-17.906,34.015 -15.931,34.015 cw(c-15.931,32.765) S243.2@-14.681,32.765 S243.2@-13.843,33.603 ; S229.2@-14.681,51.815 S229.2@-13.843,50.977
  Bottom Layer w0.254: S215.2@-17.062,70.865 S215.2@-17.018,70.821 ; S215.2@-16.452,71.445 -17.018,70.88 S215.2@-17.018,70.821 ; S229.2@-14.071,52.395 S229.2@-14.681,53.005 ; S257.1@-10.763,14.965 -13.937,18.14 cw(c-12.141,19.936) -14.681,19.936 S243.2@-14.681,32.765 S229.2@-14.681,51.815 S229.2@-14.681,53.005 ; S215.2@-17.018,70.821 -15.425,69.228 cw(c-17.221,67.432) -14.681,67.432 S229.2@-14.681,53.005
col2: S202.2 S216.2 S230.2 S244.2 S258.2 U301.23 | length 148.9
  Component Side w0.254: S230.2@-39.338,53.065 cw(c-37.128,53.065) -37.128,55.274 -27.327,55.274 ccw(c-27.327,62.354) -24.069,56.068 ccw(c-27.327,62.354) -21.041,59.096 ccw(c-27.327,62.354) -20.247,62.354 -20.247,67.171 cw(c-17.895,67.171) v1(-19.558,68.834) ; U301.23@-20.305,76.787 -19.972,76.454 -18.911,76.454 U301.23@-18.502,76.045 cw(c-20.245,74.302) -17.78,74.302 v1(-17.78,73.406)
  Bottom Layer w0.254: S258.2@-43.25,3.465 cw(c-43.25,5.173) -44.958,5.173 -44.958,11.175 cw(c-42.418,11.175) -42.418,13.715 S258.2@-40.869,13.715 ; S258.2@-38.488,13.715 -38.488,29.268 cw(c-35.948,29.268) -37.744,31.064 S244.2@-36.043,32.765 -36.043,38.801 ccw(c-38.583,38.801) -36.787,40.597 -38.594,42.404 cw(c-36.798,44.2) -39.092,43.109 cw(c-36.798,44.2) -39.338,44.2 S230.2@-39.338,53.065 -39.338,66.3 cw(c-36.798,66.3) -38.594,68.096 S216.2@-34.575,72.115 -34.575,90.424 cw(c-32.035,90.424) -32.035,92.964 -27.901,92.964 cw(c-27.901,90.424) -26.105,92.22 S202.2@-25.05,91.165 ; S244.2@-35.814,33.726 -35.433,33.345 S244.2@-35.687,33.091 ; v1(-19.558,68.834) -19.558,71.628 cw(c-17.78,71.628) v1(-17.78,73.406)
col3: S203.2 S217.2 S231.2 S245.2 U301.22 | length 163.6
  Component Side w0.254: S231.2@-58.388,53.065 -58.388,53.188 cw(c-55.848,53.188) -55.848,55.728 -27.327,55.728 ccw(c-27.327,62.354) -24.339,56.44 ccw(c-27.327,62.354) -21.413,59.366 ccw(c-27.327,62.354) -20.701,62.354 -20.701,67.726 cw(c-16.799,67.726) -19.559,70.484 ; v1(-58.293,42.672) -58.293,42.065 ccw(c-55.753,42.065) -55.753,39.525 -40,39.525 cw(c-40,37.79) -40,36.055 -46.822,36.055 ccw(c-46.822,34.015) S245.2@-48.862,34.015 ; U301.22@-20.659,76.434 -20.298,76.073 ccw(c-19.992,76.38) -19.992,75.946 -19.535,75.946 U301.22@-19.068,75.479 -18.669,75.08 -18.669,72.136 cw(c-20.509,72.136) -19.208,70.835 -19.558,70.485
  Bottom Layer w0.254: v1(-58.293,42.672) cw(c-58.293,42.767) -58.388,42.767 S231.2@-58.388,53.065 -54.369,57.084 ccw(c-56.165,58.88) -53.625,58.88 S217.2@-53.625,72.115 cw(c-52.039,72.115) -52.039,73.701 -40,73.701 ccw(c-40,75.89) -40,78.079 -41.56,78.079 cw(c-41.56,80.619) -44.1,80.619 S203.2@-44.1,91.165
col4: S204.2 S218.2 S232.2 S246.2 S260.2 U301.21 | length 291.2
  Component Side w0.254: v1(-77.47,43.434) -77.47,41.611 ccw(c-74.93,41.611) -74.93,39.071 -40,39.071 cw(c-40,37.79) -40,36.509 -65.418,36.509 ccw(c-65.418,34.015) S246.2@-67.912,34.015 ; S232.2@-77.438,53.065 -77.438,53.642 cw(c-74.898,53.642) -74.898,56.182 -27.327,56.182 ccw(c-27.327,62.354) -24.608,56.813 ccw(c-27.327,62.354) -21.786,59.635 ccw(c-27.327,62.354) -21.155,62.354 -21.155,67.914 cw(c-17.253,67.914) -20.013,70.672 -20.005,70.68 ccw(c-21.714,72.39) -19.297,72.39 -19.297,74.358 -19.358,74.358 -19.358,74.638 U301.21@-19.633,74.913 -19.845,74.913 U301.21@-21.012,76.08 ; S218.2@-72.675,72.115 cw(c-70.181,72.115) -70.181,74.609 -40,74.609 ccw(c-40,75.89) -39.096,74.982 ccw(c-40,75.89) -39.092,74.986 ccw(c-40,75.89) -38.719,75.89 ccw(c-40,75.89) -39.092,76.794 ccw(c-40,75.89) -39.096,76.798 ccw(c-40,75.89) -40,77.171 -60.579,77.171 cw(c-60.579,79.711) -63.119,79.711 v1(-63.119,81.534)
  Bottom Layer w0.254: v1(-77.47,43.434) -77.47,43.942 ccw(c-77.47,43.974) -77.438,43.974 S232.2@-77.438,53.065 -73.419,57.084 ccw(c-75.215,58.88) -72.675,58.88 S218.2@-72.675,72.115 ; S260.2@-69.449,3.465 -69.449,11.175 cw(c-66.909,11.175) -66.909,13.715 S260.2@-64.687,13.715 -64.687,29.738 ccw(c-67.227,29.738) -65.431,31.534 S246.2@-67.912,34.015 ; S204.2@-63.15,91.165 -63.15,81.565 v1(-63.119,81.534)
col5: S205.2 S219.2 S233.2 S247.2 S270.2 U301.20 | length 375.3
  Component Side w0.254: S233.2@-96.488,53.065 -96.488,54.096 cw(c-93.948,54.096) -93.948,56.636 -27.327,56.636 ccw(c-27.327,62.354) -24.874,57.189 ccw(c-27.327,62.354) -22.162,59.901 ccw(c-27.327,62.354) -21.609,62.354 -21.609,68.102 cw(c-17.707,68.102) -20.467,70.86 cw(c-17.707,68.102) -20.466,70.861 -20.341,70.986 ccw(c-21.618,72.263) -19.812,72.263 -19.812,73.961 U301.20@-20.199,74.348 -20.199,74.56 U301.20@-21.366,75.726
  Bottom Layer w0.254: S270.2@-95.643,13.715 -87.706,21.652 ccw(c-89.502,23.448) -86.962,23.448 S247.2@-86.962,34.015 cw(c-84.922,34.015) -84.922,36.055 -40,36.055 ccw(c-40,37.79) -40,39.525 -93.948,39.525 cw(c-93.948,42.065) -96.488,42.065 S233.2@-96.488,53.065 -92.469,57.084 ccw(c-94.265,58.88) -91.725,58.88 S219.2@-91.725,72.115 cw(c-89.685,72.115) -89.685,74.155 -40,74.155 ccw(c-40,75.89) -40,77.625 -79.66,77.625 cw(c-79.66,80.165) -82.2,80.165 S205.2@-82.2,91.165
col6: S206.2 S220.2 S234.2 S248.2 U301.19 | length 444.2
  Component Side w0.254: S234.2@-115.538,53.065 -115.538,54.55 cw(c-112.998,54.55) -112.998,57.09 -27.327,57.09 ccw(c-27.327,62.354) -25.139,57.566 ccw(c-27.327,62.354) -22.539,60.166 ccw(c-27.327,62.354) -22.063,62.354 -22.063,68.478 cw(c-18.615,68.478) -21.053,70.916 -20.938,71.031 ccw(c-22.17,72.263) -20.428,72.263 U301.19@-20.428,73.642 ; U301.19@-21.719,75.373 -21.308,74.962 -21.308,74.776 ccw(c-20.22,74.776) -20.989,74.007 U301.19@-20.765,73.782
  Bottom Layer w0.254: S220.2@-110.775,72.115 -110.775,58.88 cw(c-113.315,58.88) -111.519,57.084 S234.2@-115.538,53.065 -115.538,41.611 ccw(c-112.998,41.611) -112.998,39.071 -40,39.071 cw(c-40,37.79) -40,36.509 -103.518,36.509 ccw(c-103.518,34.015) S248.2@-106.012,34.015 ; S220.2@-110.775,72.316 cw(c-108.482,72.316) -108.482,74.609 -40,74.609 ccw(c-40,75.89) -40,77.171 -98.71,77.171 cw(c-98.71,79.711) -101.25,79.711 S206.2@-101.25,91.165
col7: S207.2 S221.2 S235.2 S249.2 U301.18 | length 537.2
  Component Side w0.254: S235.2@-134.588,53.065 -134.588,55.004 cw(c-132.048,55.004) -132.048,57.544 -27.327,57.544 ccw(c-27.327,62.354) -25.401,57.947 ccw(c-27.327,62.354) -22.92,60.428 ccw(c-27.327,62.354) -22.517,62.354 -22.517,68.854 cw(c-19.523,68.854) -21.641,70.97 ; S221.2@-129.825,72.115 S221.2@-129.825,72.523 ; U301.18@-22.073,75.019 -21.762,74.709 -21.762,73.648 U301.18@-21.33,73.216 -21.33,72.936 -20.994,72.599 -20.994,72.142 cw(c-22.259,72.142) -21.364,71.247 -21.64,70.971
  Bottom Layer w0.254: S249.2@-125.062,35.179 S249.2@-125.062,34.015 ccw(c-127.556,34.015) -127.556,36.509 -214,36.509 cw(c-214,37.79) -214,39.071 -137.128,39.071 ccw(c-137.128,41.611) -134.588,41.611 S235.2@-134.588,53.065 -130.569,57.084 ccw(c-132.365,58.88) -129.825,58.88 S221.2@-129.825,72.115 ccw(c-132.319,72.115) -132.319,74.609 -214,74.609 cw(c-214,75.89) -214,77.171 -122.84,77.171 ccw(c-122.84,79.711) -120.3,79.711 S207.2@-120.3,91.165
col8: S208.2 S222.2 S236.2 S250.2 S262.1 U301.17 | length 530.3
  Component Side w0.254: S236.2@-153.638,53.065 -153.638,55.458 cw(c-151.098,55.458) -151.098,57.998 -27.327,57.998 ccw(c-27.327,62.354) -25.66,58.33 ccw(c-27.327,62.354) -23.303,60.687 ccw(c-27.327,62.354) -22.971,62.354 -22.971,69.23 cw(c-20.431,69.23) -22.227,71.026 ccw(c-23.026,71.825) -21.896,71.825 U301.17@-21.896,72.651 ; S262.1@-139.35,14.965 -138.843,14.459 ccw(c-137.047,16.255) -137.047,13.715 S262.1@-134.053,13.715 ; S262.1@-134.053,14.859 S262.1@-134.053,13.715 ; S262.1@-133.743,13.715 S262.1@-134.053,13.715 ; U301.17@-22.426,74.666 -22.426,73.931 ccw(c-20.616,73.931) U301.17@-21.896,72.651
  Bottom Layer w0.254: S208.2@-139.35,91.165 -139.35,80.165 cw(c-141.89,80.165) -141.89,77.625 -214,77.625 ccw(c-214,75.89) -214,74.155 -150.915,74.155 cw(c-150.915,72.115) S222.2@-148.875,72.115 -148.875,58.88 cw(c-151.415,58.88) -149.619,57.084 S236.2@-153.638,53.065 -153.638,42.065 cw(c-156.178,42.065) -156.178,39.525 -214,39.525 ccw(c-214,37.79) -214,36.055 -146.152,36.055 cw(c-146.152,34.015) S250.2@-144.112,34.015 -144.112,17.505 ccw(c-141.572,17.505) -141.572,14.965 S262.1@-139.35,14.965 -139.35,13.97 ccw(c-136.81,13.97) -136.81,11.43 -125.213,11.43 ccw(c-125.213,13.97) -122.673,13.97 S262.1@-122.673,14.965
col9: S209.2 S223.2 S237.2 S251.2 S268.2 U301.16 | length 445.6
  Component Side w0.254: v1(-172.688,43.72) -172.688,41.611 cw(c-175.228,41.611) -175.228,39.071 -214,39.071 ccw(c-214,37.79) -214,36.509 -165.656,36.509 cw(c-165.656,34.015) S251.2@-163.162,34.015 S251.2@-163.162,34.417 ; S237.2@-172.688,53.065 -172.688,55.912 cw(c-170.148,55.912) -170.148,58.452 -27.327,58.452 ccw(c-27.327,62.354) -25.915,58.716 ccw(c-27.327,62.354) -23.689,60.942 ccw(c-27.327,62.354) -23.425,62.354 -23.425,71.562 ccw(c-24.965,71.562) U301.16@-23.876,72.651 ; -169.917,74.609 cw(c-169.916,74.355) -169.853,74.601 cw(c-170.465,72.136) S223.2@-167.925,72.136 ; v1(-158.369,81.534) -158.369,79.711 cw(c-160.909,79.711) -160.909,77.171 -214,77.171 ccw(c-214,75.89) -214,74.609 -170.419,74.609 cw(c-170.419,72.115) S223.2@-167.925,72.136 ; U301.16@-23.876,72.651 ccw(c-25.156,73.931) -23.346,73.931 U301.16@-23.346,74.666 ; S223.2@-167.925,72.136 cw(c-170.419,72.115) S223.2@-167.925,72.115 S223.2@-167.925,72.136
  Bottom Layer w0.254: v1@-172.72,43.688 ccw(c-172.72,43.72) v1(-172.688,43.72) S237.2@-172.688,53.065 -168.669,57.084 ccw(c-170.465,58.88) -167.925,58.88 S223.2@-167.925,72.115 ; S268.2@-167.081,13.715 -163.906,16.89 ccw(c-165.702,18.686) -163.162,18.686 S251.2@-163.162,34.015 ; S209.2@-158.4,91.165 -158.4,81.565 v1(-158.369,81.534)
col10: S210.2 S224.2 S238.2 S252.2 U301.15 | length 364.9
  Component Side w0.254: v1(-191.738,43.72) -191.738,42.065 cw(c-194.278,42.065) -194.278,39.525 -214,39.525 ccw(c-214,37.79) -214,36.055 -184.252,36.055 cw(c-184.252,34.015) S252.2@-182.212,34.015 S252.2@-182.212,34.29 ; S238.2@-191.738,53.065 -191.738,56.366 cw(c-189.198,56.366) -189.198,58.906 -27.327,58.906 ccw(c-27.327,62.354) -26.166,59.107 ccw(c-27.327,62.354) -24.08,61.193 ccw(c-27.327,62.354) -23.879,62.354 -23.879,70.207 ccw(c-25.17,70.207) -24.257,71.12 cw(c-22.998,72.379) -24.777,72.296 ; S224.2@-186.975,72.115 -186.975,72.253 ccw(c-188.877,72.253) -188.877,74.155 -214,74.155 cw(c-214,75.89) -214,77.625 -180.086,77.625 ccw(c-180.086,80.165) -177.546,80.165 v1(-177.546,81.407) ; -24.779,72.296 -24.779,72.599 -24.442,72.936 U301.15@-24.442,73.216 -24.01,73.648 -24.01,74.709 U301.15@-23.699,75.019
  Bottom Layer w0.254: v1@-191.77,43.688 ccw(c-191.77,43.72) v1(-191.738,43.72) S238.2@-191.738,53.065 -187.719,57.084 ccw(c-189.515,58.88) -186.975,58.88 S224.2@-186.975,72.115 ; v1(-177.546,81.407) -177.45,81.503 S210.2@-177.45,91.165
col11: S211.2 S225.2 S239.2 S253.2 S267.2 U301.14 | length 338.4
  Component Side w0.254: S239.2@-217.087,51.815 -217.087,56.82 cw(c-214.547,56.82) -214.547,59.36 -27.327,59.36 ccw(c-27.327,62.354) -26.412,59.503 ccw(c-27.327,62.354) -24.476,61.439 ccw(c-27.327,62.354) -24.333,62.354 -24.333,69.308 ccw(c-25.808,69.308) -24.764,70.35 ; -24.766,70.352 cw(c-23.367,71.749) -25.344,71.749 -25.344,73.445 U301.14@-25.007,73.782 -24.638,74.151 -24.638,74.788 U301.14@-24.053,75.373
  Bottom Layer w0.254: S267.2@-205.181,13.715 -205.181,29.044 cw(c-202.641,29.044) -204.437,30.84 S253.2@-201.262,34.015 ccw(c-202.848,34.015) -202.848,35.601 -214.547,35.601 cw(c-214.547,38.141) -217.087,38.141 S239.2@-217.087,51.815 -206.769,62.134 ccw(c-208.565,63.93) -206.025,63.93 S225.2@-206.025,72.115 ccw(c-207.611,72.115) -207.611,73.701 -214,73.701 cw(c-214,75.89) -214,78.079 -199.04,78.079 ccw(c-199.04,80.619) -196.5,80.619 S211.2@-196.5,91.165
col12: S212.2 S226.2 S240.2 S254.2 S265.1 U301.12 | length 328.4
  Component Side w0.254: S240.2@-229.838,53.065 -229.838,57.274 cw(c-227.298,57.274) -227.298,59.814 -27.327,59.814 ccw(c-27.327,62.354) -26.652,59.905 ccw(c-27.327,62.354) -24.878,61.679 ccw(c-27.327,62.354) -24.787,62.354 -24.787,66.026 ccw(c-27.327,66.026) -25.531,67.822 -26.18,68.471 cw(c-24.384,70.267) -26.924,70.267 -26.924,73.076 cw(c-24.384,73.076) -26.18,74.872 U301.12@-26.139,74.913 -25.992,74.913 -25.28,75.625 -25.256,75.601 -25.239,75.601 U301.12@-24.76,76.08
  Bottom Layer w0.254: S212.2@-215.55,91.165 -215.55,87.742 cw(c-218.09,87.742) -216.294,85.946 S226.2@-231.375,70.865 -230.581,70.071 cw(c-232.378,68.275) -229.838,68.275 S240.2@-229.838,53.065 -229.838,44.592 ccw(c-227.298,44.592) -229.094,42.796 S254.2@-220.312,34.015 S265.1@-220.312,14.965 -218.09,14.965 cw(c-218.09,12.425) -215.55,12.425 S265.1@-215.55,4.715
col13: S213.2 S241.2 U301.11 | length 284
  Component Side w0.254: S241.2@-255.162,51.815 -255.162,57.728 cw(c-252.622,57.728) -252.622,60.268 -241.681,60.268 cw(c-241.681,59.717) -241.486,60.232 cw(c-241.576,59.995) -241.349,60.107 ccw(c-237.75,61.865) -239.99,58.545 ccw(c-237.75,61.865) -236.571,58.037 ccw(c-237.75,61.865) -234.616,59.372 ccw(c-237.75,61.865) -234.143,60.124 cw(c-233.914,60.014) -233.913,60.268 cw(c-233.913,59.261) -233.201,59.973 v1(-233.045,59.817) cw(c-231.956,58.728) -231.956,60.268 -34.563,60.268 ccw(c-34.563,65.078) -29.753,65.078 -29.753,72.357 cw(c-27.213,72.357) -29.009,74.153 -28.795,74.367 cw(c-27.99,73.562) -27.99,74.7 ccw(c-27.99,75.925) -27.125,75.059 U301.11@-26.704,75.479 -26.237,75.946 -25.919,75.946 ccw(c-25.919,76.714) -25.376,76.171 U301.11@-25.113,76.434 ; -241.348,60.106 ccw(c-237.75,61.865) -241.13,59.717
  Bottom Layer w0.254: S213.2@-234.6,91.165 -234.6,62.424 ccw(c-232.06,62.424) -233.856,60.628 v1(-233.045,59.817)